# EAGLE board tiny_program_shield_V1 (EAGLE 9.4.2)
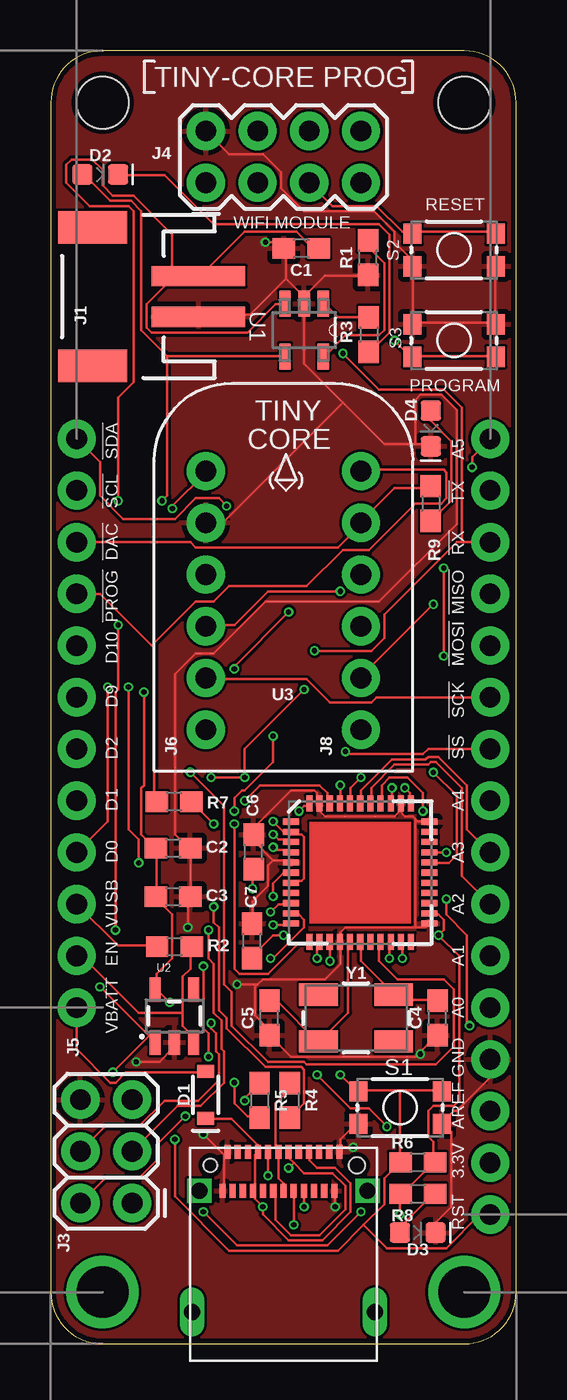
[diagram p0: board, top side]
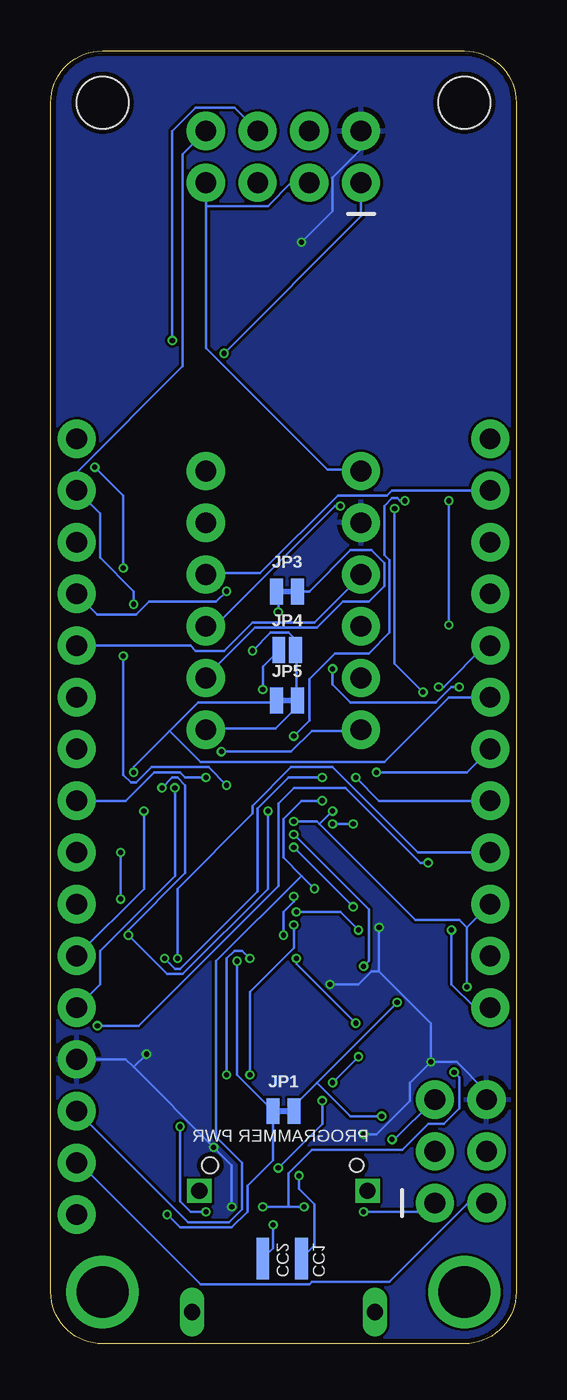
[diagram p1: board, bottom side, seen from below]

Size 22.86 x 63.5 mm. Coordinates in mm from the lower left corner, seen from the top.
Outline: 0,2.54 arc90 2.54,0 20.32,0 arc90 22.86,2.54 22.86,60.96 arc90 20.32,63.5 2.54,63.5 arc90 0,60.96 0,2.54
Copper layers (1*16): Top 0.035mm / dielectric 1.5mm / Bottom 0.035mm
Design rules "MF_Standard_2_Layer": minimum track width 5mil, minimum drill 10mil, track to track 5mil, track to pad 5mil, pad to pad 5mil, via to via 5mil, smd to smd 0mil, copper to edge 10mil, drill to drill 10mil, minimum pad ring 4mil, minimum via ring 4mil, stop-mask expansion 2mil, vias tented up to drill 25mil, thermal gap 10mil
Holes 2.54 mm at 2.54,60.96 20.32,60.96

## Footprints (pad centres in the part's own frame; a part is rotated, then mirrored left to right if it is on the bottom)
0603 = smd 1.1 x 1: 1 -0.85,0; 2 0.85,0
SOD-323 = smd 0.63 x 0.83: A 1.15,0; C -1.15,0
LED-0603 = smd 1 x 1: A -0.877,0; C 0.877,0
0.1-PAD = drill 2.54: P$1 0,0
JST-2-SMD = smd 1 x 4.6: 1 -1,-3.7; 2 1,-3.7 | smd 1.6 x 3.4: NC1 -3.4,1.5; NC2 3.4,1.5
USB-C-AMPHENOL = smd 0.3 x 0.7: A1 -2.75,0.66; A2 -2.25,0.66; A3 -1.75,0.66; A4 -1.25,0.66; A5 -0.75,0.66; A6 -0.25,0.66; A7 0.25,0.66; A8 0.75,0.66; A9 1.25,0.66; A10 1.75,0.66; A11 2.25,0.66; A12 2.75,0.66; B1 2.5,-1.25; B2 2,-1.25; B3 1.5,-1.25; B4 1,-1.25; B5 0.5,-1.25; B6 0,-1.25; B7 -0.5,-1.25; B8 -1,-1.25; B9 -1.5,-1.25; B10 -2,-1.25; B11 -2.5,-1.25; B12 -3,-1.25 | drill 0.8 pad 0.85 square: P$25 -4.13,-1.25 | drill 0.8 pad 0.81 square: P$27 4.13,-1.25 | drill 0.8 pad 0.85 long: P$28 -4.49,-7.2; P$29 4.49,-7.2 | hole 0.65: -3.6,0 | hole 0.78: 3.6,0
2X3 = drill 1.016 pad 1.88: 1 0,0; 2 0,2.54; 3 2.54,0; 4 2.54,2.54; 5 5.08,0; 6 5.08,2.54
2X4 = drill 1.016 pad 1.88: 1 -3.81,-1.27; 2 -3.81,1.27; 3 -1.27,-1.27; 4 -1.27,1.27; 5 1.27,-1.27; 6 1.27,1.27; 7 3.81,-1.27; 8 3.81,1.27
1X12_NO_SILK = drill 1.016 pad 1.88: 1 0,0; 2 2.54,0; 3 5.08,0; 4 7.62,0; 5 10.16,0; 6 12.7,0; 7 15.24,0; 8 17.78,0; 9 20.32,0; 10 22.86,0; 11 25.4,0; 12 27.94,0
1X06_NO_SILK = drill 1.016 pad 1.88: 1 0,0; 2 2.54,0; 3 5.08,0; 4 7.62,0; 5 10.16,0; 6 12.7,0
1X01_SMD_TINY = smd 0.635 x 2.032: P$1 0,0
1X16_NO_SILK = drill 1.016 pad 1.88: 1 0,0; 2 2.54,0; 3 5.08,0; 4 7.62,0; 5 10.16,0; 6 12.7,0; 7 15.24,0; 8 17.78,0; 9 20.32,0; 10 22.86,0; 11 25.4,0; 12 27.94,0; 13 30.48,0; 14 33.02,0; 15 35.56,0; 16 38.1,0
SMT-JUMPER_2_NC_TRACE_NO-SILK = smd 0.635 x 1.27: 1 -0.508,0; 2 0.508,0
SMT-JUMPER_2_NO_NO-SILK = smd 0.635 x 1.27: 1 -0.406,0; 2 0.406,0
TACTILE_SWITCH_SMD_4.6X2.8MM = smd 0.9 x 1: 1 -2.05,-0.8; 2 2.05,-0.8; 3 2.05,0.8; 4 -2.05,0.8
SOT95P280X145-5N = smd 1.27 x 0.559: 1 -1.295,0.94; 2 -1.295,0; 3 -1.295,-0.94; 4 1.295,-0.94; 5 1.295,0.94
SOT23-5 = smd 0.55 x 1.2: 1 -0.95,-1.3; 2 0,-1.3; 3 0.95,-1.3; 4 0.95,1.3; 5 -0.95,1.3
QFN-44 = smd 0.8 x 0.3: 1 -3.4,2.5; 2 -3.4,2; 3 -3.4,1.5; 4 -3.4,1; 5 -3.4,0.5; 6 -3.4,0; 7 -3.4,-0.5; 8 -3.4,-1; 9 -3.4,-1.5; 10 -3.4,-2; 11 -3.4,-2.5; 23 3.4,-2.5; 24 3.4,-2; 25 3.4,-1.5; 26 3.4,-1; 27 3.4,-0.5; 28 3.4,0; 29 3.4,0.5; 30 3.4,1; 31 3.4,1.5; 32 3.4,2; 33 3.4,2.5 | smd 0.3 x 0.8: 12 -2.5,-3.4; 13 -2,-3.4; 14 -1.5,-3.4; 15 -1,-3.4; 16 -0.5,-3.4; 17 0,-3.4; 18 0.5,-3.4; 19 1,-3.4; 20 1.5,-3.4; 21 2,-3.4; 22 2.5,-3.4; 34 2.5,3.4; 35 2,3.4; 36 1.5,3.4; 37 1,3.4; 38 0.5,3.4; 39 0,3.4; 40 -0.5,3.4; 41 -1,3.4; 42 -1.5,3.4; 43 -2,3.4; 44 -2.5,3.4
CRYSTAL-SMD-5X3.2-4PAD = smd 1.9 x 1.1: 1 -1.85,-1.15; 2 1.85,-1.15; 3 1.85,1.15; 4 -1.85,1.15

## Placement (x,y rotation side)
C1  10uF  [0603]  12.3,53.8 180 top
C2  10uF  [0603]  6,24.35 0 top
C3  1.0uF  [0603]  6,21.97 0 top
C4  26pF  [0603]  19,16 90 top
C5  26pF  [0603]  10.75,16 90 top
C6  0.1uF  [0603]  9.96,24.16 90 top
C7  1.0uF  [0603]  9.89,19.79 90 top
D1  [SOD-323]  7.61,12.23 90 top
D2  Yellow  [LED-0603]  2.43,57.43 0 top
D3  Green  [LED-0603]  18.03,5.46 0 top
D4  Blue  [LED-0603]  18.67,44.96 270 top
FRAME1  FRAME-LETTER  [CREATIVE_COMMONS]  20,-27 0 top  (outside the outline)
H1  MOUNT-PAD-ROUND0.1IN  [0.1-PAD]  2.54,2.54 0 top
H2  MOUNT-PAD-ROUND0.1IN  [0.1-PAD]  20.32,2.54 0 top
J1  [JST-2-SMD]  3.55,51.44 90 top
J2  USB-TYPE-C  [USB-C-AMPHENOL]  11.43,8.76 0 top
J3  [2X3]  3.99,6.91 90 top
J4  [2X4]  11.43,58.29 0 top
J5  [1X12_NO_SILK]  1.27,16.51 90 top
J6  [1X06_NO_SILK]  7.62,30.16 90 top
J7  [1X01_SMD_TINY]  10.54,4.19 0 bottom
J8  [1X06_NO_SILK]  15.24,30.16 90 top
J9  [1X16_NO_SILK]  21.59,6.35 90 top
J10  [1X01_SMD_TINY]  12.45,4.19 0 bottom
JP1  JUMPER-SMT_2_NC_TRACE_NO-SILK  [SMT-JUMPER_2_NC_TRACE_NO-SILK]  11.43,11.43 0 bottom
JP3  JUMPER-SMT_2_NC_TRACE_NO-SILK  [SMT-JUMPER_2_NC_TRACE_NO-SILK]  11.25,36.95 0 bottom
JP4  JUMPER-SMT_2_NO_NO-SILK  [SMT-JUMPER_2_NO_NO-SILK]  11.25,34.08 0 bottom
JP5  JUMPER-SMT_2_NC_TRACE_NO-SILK  [SMT-JUMPER_2_NC_TRACE_NO-SILK]  11.25,31.59 0 bottom
R1  10K  [0603]  15.59,53.35 90 top
R2  100K  [0603]  6.07,19.51 0 top
R3  1K  [0603]  15.62,49.57 270 top
R4  22  [0603]  11.74,11.95 270 top
R5  22  [0603]  10.25,11.95 270 top
R6  10K  [0603]  18.03,8.91 180 top
R7  4.7K  [0603]  6.05,26.63 180 top
R8  1K  [0603]  18.03,7.37 180 top
R9  100  [0603]  18.67,41.27 270 top
S1  SWITCH-MOMENTARY-2SMD-4.6X2.8MM  [TACTILE_SWITCH_SMD_4.6X2.8MM]  17.16,11.6 180 top
S2  SWITCH-MOMENTARY-2SMD-4.6X2.8MM  [TACTILE_SWITCH_SMD_4.6X2.8MM]  19.81,53.72 180 top
S3  SWITCH-MOMENTARY-2SMD-4.6X2.8MM  [TACTILE_SWITCH_SMD_4.6X2.8MM]  19.81,49.28 180 top
U1  MCP73831T-4ADI/OT  [SOT95P280X145-5N]  12.45,49.78 270 top
U2  SPX3819M5_3_3  [SOT23-5]  6.07,16.1 0 top
U3  32U4  [QFN-44]  15.2,23.14 0 top
Y1  8MHz  [CRYSTAL-SMD-5X3.2-4PAD]  15,16 0 top

## Library data of the parts
C1 C2 = SparkFun-Capacitors; PROD_ID: CAP-11015
C3 C7 = SparkFun-Capacitors; PROD_ID: CAP-00868
C4 C5 = SparkFun-Capacitors; PROD_ID: CAP-07876
C6 = SparkFun-Capacitors; PROD_ID: CAP-08604
D1 = SparkFun-DiscreteSemi; PROD_ID: DIO-11623
D2-D4 = SparkFun-LED; PROD_ID: DIO-09003
FRAME1 = SparkFun-Aesthetics; DESIGNER: Kangmin
H1 H2 J2 J7 J10 = graftel-internal-ic
J1 = SparkFun-Connectors; PROD_ID: CONN-11443; SF_ID: PRT-08612
J3 = SparkFun-Connectors; PROD_ID: CONN-09701
J4-J6 J8 J9 = SparkFun-Connectors
JP1 JP3-JP5 = SparkFun-Jumpers
R1-R9 = SparkFun-Resistors
S1-S3 = graftel-internal-ic; PROD_ID: SWCH-13065
U1 = graftel-internal-ic; AVAILABILITY: Unavailable; DESCRIPTION: Tiny Integrated Li-Ion/Li-Poly Charge mgnt controller, 4.4V Vreg out; MF: Microchip; MP: MCP73831T-4ADI/OT; PACKAGE: SOT-23-5 Microchip; PRICE: None
U2 = SparkFun-IC-Power; PROD_ID: VREG-13321
U3 = SparkFun-IC-Microcontroller; PROD_ID: IC-10828
Y1 = SparkFun-Clocks; PARTNO: 535-9720-1-ND; PROD_ID: XTAL-09431

## Nets
3.3V: C2.1 C3.1 J3.2 J4.3 J4.7 J6.6 J9.2 JP1.2 U2.5
A0: J9.5 U3.36
A1: J9.6 U3.37
A2: J9.7 U3.38
A3: J9.8 U3.39
A4: J9.9 U3.40
A5: J9.16 U3.41
AREF: C6.1 J9.3 U3.42
CC1: J2.A5 J7.P$1
CC2: J2.B5 J10.P$1
CORE_MISO: J6.3 J9.13
CORE_MOSI: J6.4 J9.12
CORE_RX: J4.1 J8.1 J9.14 JP4.2 JP5.2
CORE_SCK: J6.2 J9.11
CORE_SCL: J5.11 J8.4
CORE_SDA: J5.12 J8.3
CORE_SS: J6.1 J9.10
CORE_TX: J4.8 J8.2 J9.15 JP3.2
D0: J5.4 JP3.1 U3.20
D1: J5.5 JP4.1 U3.21
D2: J5.6 U3.19
D3: U3.18
D9: J5.7 JP5.1 U3.29
D10: J5.8 U3.30
DAC/AIN6: J5.10 J8.5 R9.1
EN: J5.2 R2.2 U2.3
GND: C1.2 C2.2 C3.2 C4.1 C5.1 C6.2 C7.2 D3.C D4.C J1.1 J2.A1 J2.A12 J2.B1 J2.B12 J3.6 J4.2 J6.5 J9.4 R1.1 S1.3 S1.4 S2.3 S2.4 S3.1 S3.2 U1.2 U2.2 U3.5 U3.15 U3.23 U3.33 U3.35 U3.43
MISO: J3.1 U3.11
MOSI: J3.4 U3.10
N$1: J2.A6 J2.B6 R4.1
N$2: J2.A7 J2.B7 R5.1
N$3: R4.2 U3.4
N$4: R5.2 U3.3
N$5: C4.2 U3.17 Y1.3
N$6: C5.2 U3.16 Y1.1
N$7: R1.2 U1.5
N$8: R3.1 U1.1
N$9: D2.C R3.2
N$10: C7.1 U3.6
N$11: J4.5 S2.1 S2.2
N$12: R7.1 U3.12
N$13: J4.6 S3.3 S3.4
N$14: JP1.1 R6.1 R8.2 U3.14 U3.24 U3.34 U3.44
N$15: D3.A R8.1
N$16: D4.A R9.2
PROG: J5.9 J8.6 R7.2
RST: J3.5 J9.1 R6.2 S1.1 S1.2 U3.13
SCK: J3.3 U3.9
V_BATT: C1.1 D1.A J1.2 J5.1 U1.3
V_USB: D1.C D2.A J2.A4 J2.A9 J2.B4 J2.B9 J5.3 R2.1 U1.4 U2.1 U3.2 U3.7

## Tracks (layer width: path | path; a pad name or v marks a point on that pad's centre or on a via)
3.3V  (via drill 0.25)
  Top 0.127: 5.21,17.4 5.21,18.16 5.97,18.92 5.97,21.08 5.21,21.84 C3.1 5.21,21.97 5.21,24.26 C2.1 5.08,24.38 4.45,25.02 4.45,27.3 4.57,27.43 v4.57,32 | 5.21,17.4 v5.84,16.76 | 5.21,17.4 U2.5 | v6.6,11.18 5.21,9.78 5.21,9.02 4.32,8.13 2.67,8.13 1.52,6.99 J3.2 | v5.97,41.02 5.97,41.15 7.62,42.8 J6.6
  Bottom 0.127: J4.7 15.24,55.88 | 15.24,55.88 15.24,48.9 9.27,42.93 7.62,42.93 J6.6 | J4.3 11.05,57.02 12.19,55.88 15.24,55.88 | JP1.2 10.92,11.68 9.78,12.83 | v5.84,16.76 9.78,12.83 | J9.2 21.46,8.89 15.49,2.92 10.16,2.92 10.03,3.05 6.22,3.05 2.41,6.86 1.52,6.86 J3.2 | 9.78,12.83 8.13,11.18 v6.6,11.18 | v5.97,41.02 5.97,33.4 v4.57,32
A0  (via drill 0.25)
  Top 0.127: v16.76,27.3 16.76,26.54 U3.36
  Bottom 0.127: v16.76,27.3 16.76,22.99 20.45,19.3 20.45,17.65 J9.5
A1  (via drill 0.25)
  Top 0.127: v18.29,26.16 18.29,27.05 17.53,27.81 16.64,27.81 16.26,27.43 16.26,26.54 U3.37
  Bottom 0.127: v18.29,26.16 18.29,22.35 J9.6
A2
  Top 0.127: J9.7 20.19,22.99 20.19,27.3 18.92,28.57 18.67,28.57 18.54,28.45 16.89,28.45 15.75,27.3 15.75,26.54 U3.38
A3
  Top 0.127: J9.8 20.45,25.27 20.45,27.43 19.05,28.83 18.54,28.83 18.41,28.7 16.76,28.7 15.24,27.18 15.24,26.54 U3.39
A4  (via drill 0.25)
  Top 0.127: v15.24,27.81 14.73,27.3 14.73,26.54 U3.40
  Bottom 0.127: v15.24,27.81 16.26,27.81 16.51,28.07 17.78,28.07 19.18,26.67 J9.9
A5  (via drill 0.25)
  Top 0.127: v14.22,27.43 14.22,26.54 U3.41 | v19.3,38.1 v19.3,33.78 | v20.7,43.05 20.7,43.56 J9.16
  Bottom 0.127: v14.22,27.43 15.11,28.32 17.91,28.32 18.67,27.56 18.92,27.56 19.3,27.94 v19.3,33.78 | v19.3,38.1 19.3,41.66 v20.7,43.05
AREF  (via drill 0.25)
  Top 0.127: v9.53,26.67 10.29,27.43 13.21,27.43 13.59,27.05 13.59,26.54 U3.42 | v9.91,22.35 9.91,23.24 C6.1
  Bottom 0.127: v9.53,26.67 10.54,26.67 11.43,25.78 11.43,23.88 10.54,22.99 | v9.91,22.35 10.54,22.99 | 10.54,22.99 14.73,18.8 14.73,10.16 13.46,8.89 13.46,6.6 14.1,5.97 16.13,5.97 J9.3
CC1  (via drill 0.25)
  Top 0.127: v10.67,8.26 10.67,9.4 J2.A5
  Bottom 0.127: v10.67,8.26 10.67,7.62 9.91,6.86 9.91,4.83 J7.P$1
CC2  (via drill 0.25)
  Top 0.127: v11.94,5.84 11.94,7.49 J2.B5
  Bottom 0.127: v11.94,5.84 11.94,4.7 J10.P$1
CORE_MISO  (via drill 0.25)
  Top 0.127: v14.22,36.96 10.67,36.96 9.02,35.31 7.62,35.31 J6.3
  Bottom 0.127: v14.22,36.96 14.73,36.45 18.03,36.45 18.67,35.81 20.57,35.81 J9.13
CORE_MOSI
  Bottom 0.127: J9.12 16,34.29 15.75,34.04 14.35,34.04 12.95,35.43 9.91,35.43 7.62,37.72 J6.4
CORE_RX  (via drill 0.25)
  Top 0.127: 20.19,39.37 19.94,39.37 16.38,35.81 16.38,34.67 15.75,34.04 v12.95,34.04 | 20.19,39.37 J9.14 | v14.35,48.64 16.13,46.86 19.3,46.86 20.19,45.97 20.19,39.37
  Bottom 0.127: J8.1 15.24,30.23 11.81,30.23 10.79,31.24 10.79,31.5 JP5.2 10.79,31.62 10.79,34.04 JP4.2 10.92,34.16 10.92,34.67 11.18,34.92 12.06,34.92 v12.95,34.04 | J4.1 7.62,55.37 v14.35,48.64
CORE_SCK
  Top 0.127: J9.11 16,31.75 15.75,31.5 13.72,31.5 12.57,32.64 7.62,32.64 J6.2
CORE_SCL
  Bottom 0.127: J5.11 6.1,41.91 6.35,41.66 8.76,41.66 12.57,37.85 15.24,37.85 J8.4
CORE_SDA  (via drill 0.25)
  Top 0.127: v8.64,41.15 8.26,41.53 7.11,41.53 6.1,40.51 3.56,40.51 2.41,41.66 2.41,43.31 J5.12
  Bottom 0.127: v8.64,41.15 8.89,41.15 14.73,35.31 15.24,35.31 J8.3
CORE_SS  (via drill 0.25)
  Top 0.127: v14.48,29.08 14.61,29.08 14.73,28.96 18.29,28.96 18.54,29.21 J9.10
  Bottom 0.127: v14.48,29.08 11.05,29.08 10.03,30.1 7.62,30.1 J6.1
CORE_TX  (via drill 0.25)
  Top 0.127: v18.8,36.32 15.24,32.77 J8.2
  Bottom 0.127: JP3.2 10.67,36.96 10.16,36.96 8.13,38.99 7.11,38.99 6.48,38.35 6.48,37.21 7.24,36.45 8.51,36.45 9.78,35.18 12.83,35.18 15.24,32.77 J8.2 | J4.8 16.38,58.42 16.38,48.01 21.59,42.8 J9.15 20.45,40.77 20.45,38.61 18.8,36.96 v18.8,36.32
D0  (via drill 0.25)
  Top 0.127: v16.64,18.92 16.64,19.68 U3.20 | v11.68,35.94 9.02,33.27 v9.02,33.15 | v2.79,32.26 2.79,25.65 J5.4
  Bottom 0.127: v16.64,18.92 16.64,22.35 12.95,26.04 12.95,26.42 11.05,28.32 9.02,28.32 4.83,24.13 J5.4 | v11.68,35.94 11.68,36.83 JP3.1 | v9.02,33.15 9.02,32.38 8.13,31.5 3.94,31.5 3.17,32.26 v2.79,32.26
D1  (via drill 0.25)
  Top 0.127: v17.27,18.92 17.27,19.68 U3.21 | v12.45,32.13 9.53,29.21 v9.53,27.81 v7.87,27.81
  Bottom 0.127: v17.27,18.92 16.76,18.41 16.51,18.41 12.7,22.23 12.7,26.29 11.18,27.81 v9.53,27.81 | v12.45,32.13 12.45,33.27 11.68,34.04 JP4.1 | J5.5 6.73,26.67 v7.87,27.81
D2  (via drill 0.25)
  Top 0.127: v6.86,28.07 8.51,26.42 8.51,17.65 8.89,17.27 8.89,15.62 10.67,13.84 12.45,13.84 12.57,13.72 18.92,13.72 19.81,14.61 19.81,17.4 19.3,17.91 17.02,17.91 16.13,18.8 16.13,19.68 U3.19
  Bottom 0.127: v6.86,28.07 2.41,28.07 J5.6
D9  (via drill 0.25)
  Top 0.127: v18.8,28.07 19.94,26.92 19.94,24 19.56,23.62 18.67,23.62 U3.29
  Bottom 0.127: v18.8,28.07 18.8,28.32 17.02,30.1 | 17.02,30.1 15.62,31.5 11.81,31.5 JP5.1 | J5.7 3.3,31.75 6.48,28.57 15.49,28.57 17.02,30.1
D10  (via drill 0.25)
  Top 0.127: v19.43,24.13 18.67,24.13 U3.30 | v19.43,21.84 19.43,21.08 20.45,20.07 20.45,15.75 v20.57,15.62 | v4.32,23.62 4.32,24.77 3.81,25.27 v3.81,32.26
  Bottom 0.127: v19.43,21.84 v19.43,24.13 | v20.57,15.62 18.54,15.62 11.68,22.48 11.68,26.54 10.92,27.3 8.38,27.3 4.7,23.62 v4.32,23.62 | v3.81,32.26 3.56,32.26 1.52,34.29 J5.8
DAC/AIN6
  Top 0.127: R9.1 18.67,42.04 16.89,42.04 15.24,40.39 J8.5 15.24,40.26 14.1,39.12 7.11,39.12 6.86,39.37 J5.10
EN
  Top 0.127: 6.48,16.26 6.48,15.62 6.99,15.11 6.99,14.86 U2.3 | 6.48,16.26 6.48,18.03 6.86,18.41 6.86,19.43 R2.2 | 6.48,16.26 4.32,16.26 1.52,19.05 J5.2
GND  (via drill 0.25)
  Top 0.127: 17.78,50.16 17.78,52.83 S2.3 17.65,52.96 17.65,53.34 16.89,54.1 16.89,54.61 15.88,55.63 12.45,55.63 11.3,56.77 11.3,57.53 10.41,58.42 8.76,58.42 J4.2 | 21.84,50.16 21.84,52.83 S2.4 | 21.84,50.16 17.78,50.16 | 17.78,50.16 S3.2 | 21.84,50.16 S3.1 | 17.91,44.2 16.38,44.2 14.35,46.23 | 17.91,44.2 18.67,44.2 D4.C | 14.35,46.23 12.45,48.13 U1.2 | 11.56,52.32 11.56,53.72 C1.2 11.43,53.85 11.18,54.1 v10.54,54.1 | 12.45,51.44 11.56,52.32 | U1.2 12.45,51.44 | 12.45,51.44 13.46,52.45 15.49,52.45 R1.1 | 12.45,51.18 U1.2 | 14.35,46.23 8.51,40.39 7.62,40.39 J6.5 | 11.56,52.32 9.78,50.55 7.37,50.55 J1.1 | 8.51,9.27 8.51,7.62 J2.B12 | 8.51,9.27 8.64,9.4 J2.A1 | v4.19,13.84 5.33,13.84 5.97,14.48 5.97,14.73 U2.2 | v7.49,10.29 8.51,9.27 | v6.73,20.45 6.73,21.84 C3.2 6.86,24.26 C2.2 6.73,24.38 6.1,25.02 6.1,32.89 7.11,33.91 8,33.91 10.54,36.45 16.13,36.45 19.94,40.26 19.94,45.85 19.18,46.61 18.16,46.61 17.91,46.35 17.91,44.2 | D3.C 18.92,5.46 18.92,5.97 19.68,6.73 19.68,10.41 19.3,10.79 S1.4 19.3,10.92 19.81,11.43 19.94,11.43 21.59,13.08 J9.4 | 14.22,9.65 14.22,10.03 14.99,10.79 S1.3 | 14.22,9.65 14.22,9.53 J2.A12 14.22,9.65 | v13.97,6.73 13.97,7.49 J2.B1 | v14.86,9.65 14.22,9.65 | 17.91,20.45 18.41,20.45 18.54,20.57 U3.23 | 17.91,20.45 14.48,20.45 14.22,20.19 14.22,19.81 U3.15 14.22,19.68 14.22,18.67 13.46,17.91 10.41,17.91 10.16,17.65 | 10.16,17.65 10.03,17.53 10.03,16.13 10.67,15.49 10.67,15.24 C5.1 10.79,15.11 11.81,14.1 17.91,14.1 18.03,14.22 | 18.03,14.22 18.92,15.11 C4.1 | 17.14,26.16 16.89,25.91 13.46,25.91 13.21,26.16 13.21,26.42 U3.43 13.08,26.54 13.08,27.05 12.95,27.18 11.81,27.18 10.03,25.4 10.03,25.02 C6.2 10.03,24.89 10.03,24.64 10.92,23.75
  Top 0.127: 17.14,26.16 17.14,26.42 U3.35 17.14,26.16 | 17.91,25.78 17.78,25.91 17.4,25.91 17.14,26.16 | 17.91,25.78 18.03,25.65 18.54,25.65 U3.33 | 10.92,23.75 11.68,23.75 U3.5 | 10.92,23.75 10.67,23.5 10.67,22.48 9.91,21.72 9.91,20.7 C7.2 | 17.91,25.78 17.91,20.45 | 18.03,14.22 v18.16,14.22 | 10.16,17.65 v9.14,17.65
  Bottom 0.127: J4.2 7.62,58.67 9.02,57.28 9.02,55.63 v10.54,54.1 | v4.19,13.84 2.92,13.84 1.52,12.45 1.52,12.06 J3.6 | v7.49,10.29 6.86,10.29 5.21,11.94 5.21,12.83 v4.19,13.84 | 6.73,18.29 v6.73,20.45 | 6.73,18.29 4.19,15.75 v4.19,13.84 | v13.97,6.73 13.97,8.76 v14.86,9.65 18.8,13.59 | 18.8,13.59 19.18,13.97 J9.4 | v18.16,14.22 18.8,13.59 | 6.73,18.29 7.11,18.29 7.75,17.65 v9.14,17.65
  pour Top: 20.32,63.5 2.54,63.5 arc90 0,60.96 0,2.54 arc90 2.54,0 20.32,0 arc90 22.86,2.54 22.86,60.96 arc90
  pour Bottom: 2.54,63.5 20.32,63.5 arc-90 22.86,60.96 22.86,2.54 arc-90 20.32,0 2.54,0 arc-90 0,2.54 0,60.96 arc-90
MISO  (via drill 0.25)
  Top 0.127: v10.92,20.57 11.68,20.57 U3.11 | v13.08,13.21 14.73,11.56 15.62,11.56 v16.51,10.67 | v15.24,6.48 13.59,4.83 9.14,4.83 v7.49,6.48
  Bottom 0.127: v10.92,20.57 10.92,19.43 13.08,17.27 v13.08,13.21 | v16.51,10.67 16.51,6.99 16,6.48 v15.24,6.48 | v7.49,6.48 4.45,6.48 4.06,6.86 J3.1
MOSI  (via drill 0.25)
  Top 0.127: v10.79,18.92 10.92,18.92 12.45,20.45 12.45,20.83 12.19,21.08 11.81,21.08 U3.10 | v7.87,15.75 7.87,15.49 8.13,15.24 8.13,14.35 8.26,14.22 8.26,12.95 7.24,11.94 5.59,11.94 4.32,10.67 2.67,10.67 1.52,9.53 J3.4
  Bottom 0.127: v10.79,18.92 10.79,18.67 v7.87,15.75
N$1
  Top 0.127: J2.B6 11.43,7.87 11.18,8.13 11.18,9.4 J2.A6 11.18,9.53 11.05,9.65 11.05,11.81 11.68,12.45 11.68,12.7 R4.1
N$2  (via drill 0.25)
  Top 0.127: 11.94,8.89 11.68,9.14 11.68,9.4 J2.A7 | 11.94,8.89 12.45,8.38 13.84,8.38 14.48,7.75 14.48,6.6 13.21,5.33 11.81,5.33 11.05,6.1 11.05,7.49 J2.B7 | v9.53,11.94 9.53,12.06 10.16,12.7 R5.1 | 11.94,8.89 v11.68,8.64
  Bottom 0.127: v9.53,11.94 9.53,10.79 v11.68,8.64
N$3  (via drill 0.25)
  Top 0.127: v10.92,24.38 11.05,24.26 11.68,24.26 U3.4 | v8,21.46 8,20.7 8.26,20.45 8.26,16.38 8.64,16 8.64,15.49 10.54,13.59 12.32,13.59 12.45,13.46 12.45,11.81 11.81,11.18 R4.2
  Bottom 0.127: v8,21.46 v10.92,24.38
N$4  (via drill 0.25)
  Top 0.127: v10.92,25.02 11.18,24.77 11.68,24.77 U3.3 | v7.49,18.54 7.49,16 7.37,15.88 7.37,15.62 7.75,15.24 v7.75,14.1 | v9.02,12.83 9.02,11.81 9.65,11.18 10.16,11.18 R5.2
  Bottom 0.127: v10.92,25.02 7.24,21.34 7.24,18.8 v7.49,18.54 | v9.02,12.83 v7.75,14.1
N$5
  Top 0.127: U3.17 15.24,19.68 15.24,18.8 16.76,17.27 Y1.3 16.89,17.14 17.14,16.89 18.92,16.89 C4.2
N$6
  Top 0.127: U3.16 14.61,19.68 14.61,16.26 13.21,14.86 Y1.1 13.08,14.86 11.18,16.76 10.79,16.76 C5.2
N$7
  Top 0.127: R1.2 15.62,54.1 15.62,53.85 16.38,53.09 16.38,49.78 16.13,49.53 14.48,49.53 13.46,48.51 U1.5
N$8
  Top 0.127: R3.1 14.1,50.42 13.46,51.05 U1.1
N$9
  Top 0.127: D2.C 3.43,57.4 5.59,57.4 8,54.99 16.13,54.99 16.64,54.48 16.64,49.66 15.75,48.77 R3.2
N$10  (via drill 0.25)
  Top 0.127: v10.92,21.97 10.92,22.61 11.43,23.11 11.68,23.11 U3.6 | v11.43,20.07 10.92,20.07 9.91,19.05 C7.1
  Bottom 0.127: v10.92,21.97 10.92,21.72 11.43,21.21 v11.43,20.07
N$11
  Top 0.127: S2.1 21.84,54.61 17.78,54.61 S2.2 17.65,54.61 17.27,54.61 16,55.88 13.84,55.88 J4.5
N$12  (via drill 0.25)
  Top 0.127: v9.02,25.53 9.02,18.41 9.27,18.16 10.67,18.16 12.19,19.68 12.7,19.68 U3.12 | v8,25.53 6.99,26.54 R7.1
  Bottom 0.127: v8,25.53 v9.02,25.53
N$13  (via drill 0.25)
  Top 0.127: S3.4 21.84,48.51 17.78,48.51 S3.3 17.65,48.51 v16.89,49.28
  Bottom 0.127: v16.89,49.28 16.89,59.56 15.75,60.71 13.84,60.71 J4.6
N$14  (via drill 0.25)
  Top 0.127: v13.72,18.8 13.72,19.68 U3.14 | v12.19,26.16 12.45,26.42 12.7,26.42 U3.44 | U3.24 18.67,21.08 19.05,21.08 19.3,20.83 19.3,20.32 v19.05,20.07 20.07,19.05 20.07,11.94 19.81,11.68 18.8,11.68 18.54,11.43 18.54,10.16 18.8,9.91 18.8,9.02 R6.1 18.8,8.89 17.27,7.37 R8.2 17.14,7.37 v17.14,6.35 | v17.4,27.3 17.65,27.05 17.65,26.54 U3.34
  Bottom 0.127: v13.72,18.8 13.72,13.21 JP1.1 11.94,9.02 13.21,7.75 13.21,6.48 13.97,5.71 16.51,5.71 v17.14,6.35 | v12.19,26.16 12.19,22.35 16.38,18.16 17.14,18.16 v19.05,20.07 19.05,20.32 16.26,23.11 16.26,27.43 16.64,27.81 16.89,27.81 v17.4,27.3
N$15
  Top 0.127: D3.A 17.27,5.46 17.27,5.84 18.8,7.37 R8.1
N$16
  Top 0.127: D4.A 18.67,45.34 19.68,44.32 19.68,41.4 18.67,40.39 R9.2
PROG
  Top 0.127: 4.95,34.29 2.41,36.83 J5.9 | 4.95,34.29 5.08,34.16 5.08,26.67 R7.2 | 4.95,34.29 7.11,36.45 8,36.45 8.76,37.21 12.57,37.21 14.35,38.99 15.62,38.99 17.91,41.27 19.18,41.27 19.43,41.53 19.43,42.8 19.3,42.93 15.24,42.93 J8.6
RST  (via drill 0.25)
  Top 0.127: v13.08,18.92 13.08,19.68 U3.13 | v14.22,13.21 14.99,12.45 S1.2 15.11,12.45 17.14,12.45 | 17.14,12.45 19.18,12.45 S1.1 | 17.14,12.45 17.14,9.02 R6.2 17.14,8.89 16.38,8.13 16.38,6.86 15.37,5.84 | v6.1,10.03 6.1,7.24 8.76,4.57 14.1,4.57 15.37,5.84 | J9.1 21.08,6.35 19.43,4.7 16.51,4.7 15.37,5.84
  Bottom 0.127: v13.08,18.92 13.46,19.3 13.84,19.3 14.22,18.92 v14.22,13.21 | v6.1,10.03 5.97,10.03 4.06,11.94 J3.5
SCK  (via drill 0.25)
  Top 0.127: v10.79,21.21 11.18,21.59 11.68,21.59 U3.9 | v7.75,20.32 7.75,18.92 8,18.67 8,16.26 8.38,15.88 8.38,14.48 8.51,14.35 8.51,12.83 7.37,11.68 6.22,11.68 4.06,9.53 J3.3
  Bottom 0.127: v10.79,21.21 8.64,21.21 v7.75,20.32
V_BATT  (via drill 0.25)
  Top 0.127: J5.1 1.27,14.48 2.92,12.83 3.17,12.83 3.68,13.34 7.49,13.34 D1.A | C1.1 13.08,53.85 12.83,53.85 12.06,54.61 9.53,54.61 7.37,52.45 J1.2 | 5.97,52.32 4.7,51.05 4.7,49.91 4.95,49.66 9.65,49.66 11.05,51.05 11.43,51.05 U1.3 | 5.97,52.32 7.24,52.32 J1.2 | v3.17,20.32 3.17,32 3.3,32.13 v3.3,35.31 | v3.3,41.4 3.3,46.48 4.06,47.24 4.06,55.63 3.81,55.88 1.91,55.88 0.76,57.02 0.76,57.91 1.02,58.17 2.03,58.17 2.54,57.66 2.54,56.9 3.05,56.39 4.06,56.39 5.97,54.48 5.97,52.32 | 5.97,52.32 J1.2
  Bottom 0.127: J5.1 2.03,16.51 3.17,17.65 v3.17,20.32 | v3.3,41.4 v3.3,35.31
V_USB  (via drill 0.25)
  Top 0.127: 5.71,48.51 4.45,49.78 4.45,55.63 3.94,56.13 2.92,56.13 1.65,57.4 D2.A | 5.71,48.51 11.43,48.51 U1.4 | v12.45,6.73 12.45,7.49 J2.B4 | J2.A9 12.7,9.4 12.7,9.02 13.08,8.64 13.97,8.64 14.73,7.87 14.73,6.48 13.34,5.08 11.68,5.08 10.41,6.35 v10.41,6.73 10.03,7.11 10.03,7.49 J2.B9 10.03,7.62 10.03,9.27 10.16,9.4 J2.A4 10.16,9.53 10.16,9.78 8.89,11.05 7.62,11.05 D1.C | U3.7 11.81,22.73 12.32,22.73 12.45,22.86 12.45,24.89 12.32,25.02 11.81,25.02 U3.2 11.68,25.15 11.43,25.15 v10.92,25.65 | J5.3 3.3,19.56 5.21,19.56 R2.1 | v2.41,17.53 4.83,15.11 | 4.83,15.11 5.08,14.86 U2.1 | 4.83,15.11 v3.05,13.34 | 5.71,48.51 5.71,41.66 v5.46,41.4 | v10.92,29.84 10.92,28.57 9.53,27.18 9.4,27.18 9.02,26.8 v9.02,26.16
  Bottom 0.127: v10.41,6.73 11.18,6.73 | 11.18,6.73 v12.45,6.73 | 2.41,20.45 v2.41,17.53 | J5.3 2.41,20.45 | v10.92,25.65 9.78,25.65 9.65,25.53 | 9.65,25.53 4.95,20.83 2.79,20.83 2.41,20.45 | 11.18,6.73 11.18,8.38 10.03,9.53 5.59,9.53 4.32,10.79 3.56,10.79 2.79,11.56 2.79,13.08 v3.05,13.34 | v5.46,41.4 5.71,41.4 5.84,41.53 6.1,41.53 6.48,41.15 6.48,38.73 6.22,38.48 6.22,34.92 7.24,33.91 8.89,33.91 10.16,32.64 10.16,30.61 v10.92,29.84 | 9.65,25.53 v9.02,26.16

## Text on the board
tPlace: TINY-CORE PROG | RESET | WIFI MODULE | PROGRAM | TINY | CORE | !SDA | A5 | !SCL | !TX | !RX | !DAC | !MISO | !PROG | D10 | !MOSI | D9 | !SCK | D2 | !SS | D1 | A4 | D0 | A3 | A2 | VUSB | EN | A1 | A0 | VBATT | GND | AREF | 3.3V | RST
bPlace: PROGRAMMER PWR | CC1 | CC2